# Altium PCB Tube1.PcbDoc
Units mil, origin at the board's own origin, x right, y up, seen from the top; angles counter-clockwise.
Board outline 3880 x 3880 mil, 2 copper layers (Top Layer, Bottom Layer); 66 components, 44 nets, 274 pads, 51 vias.
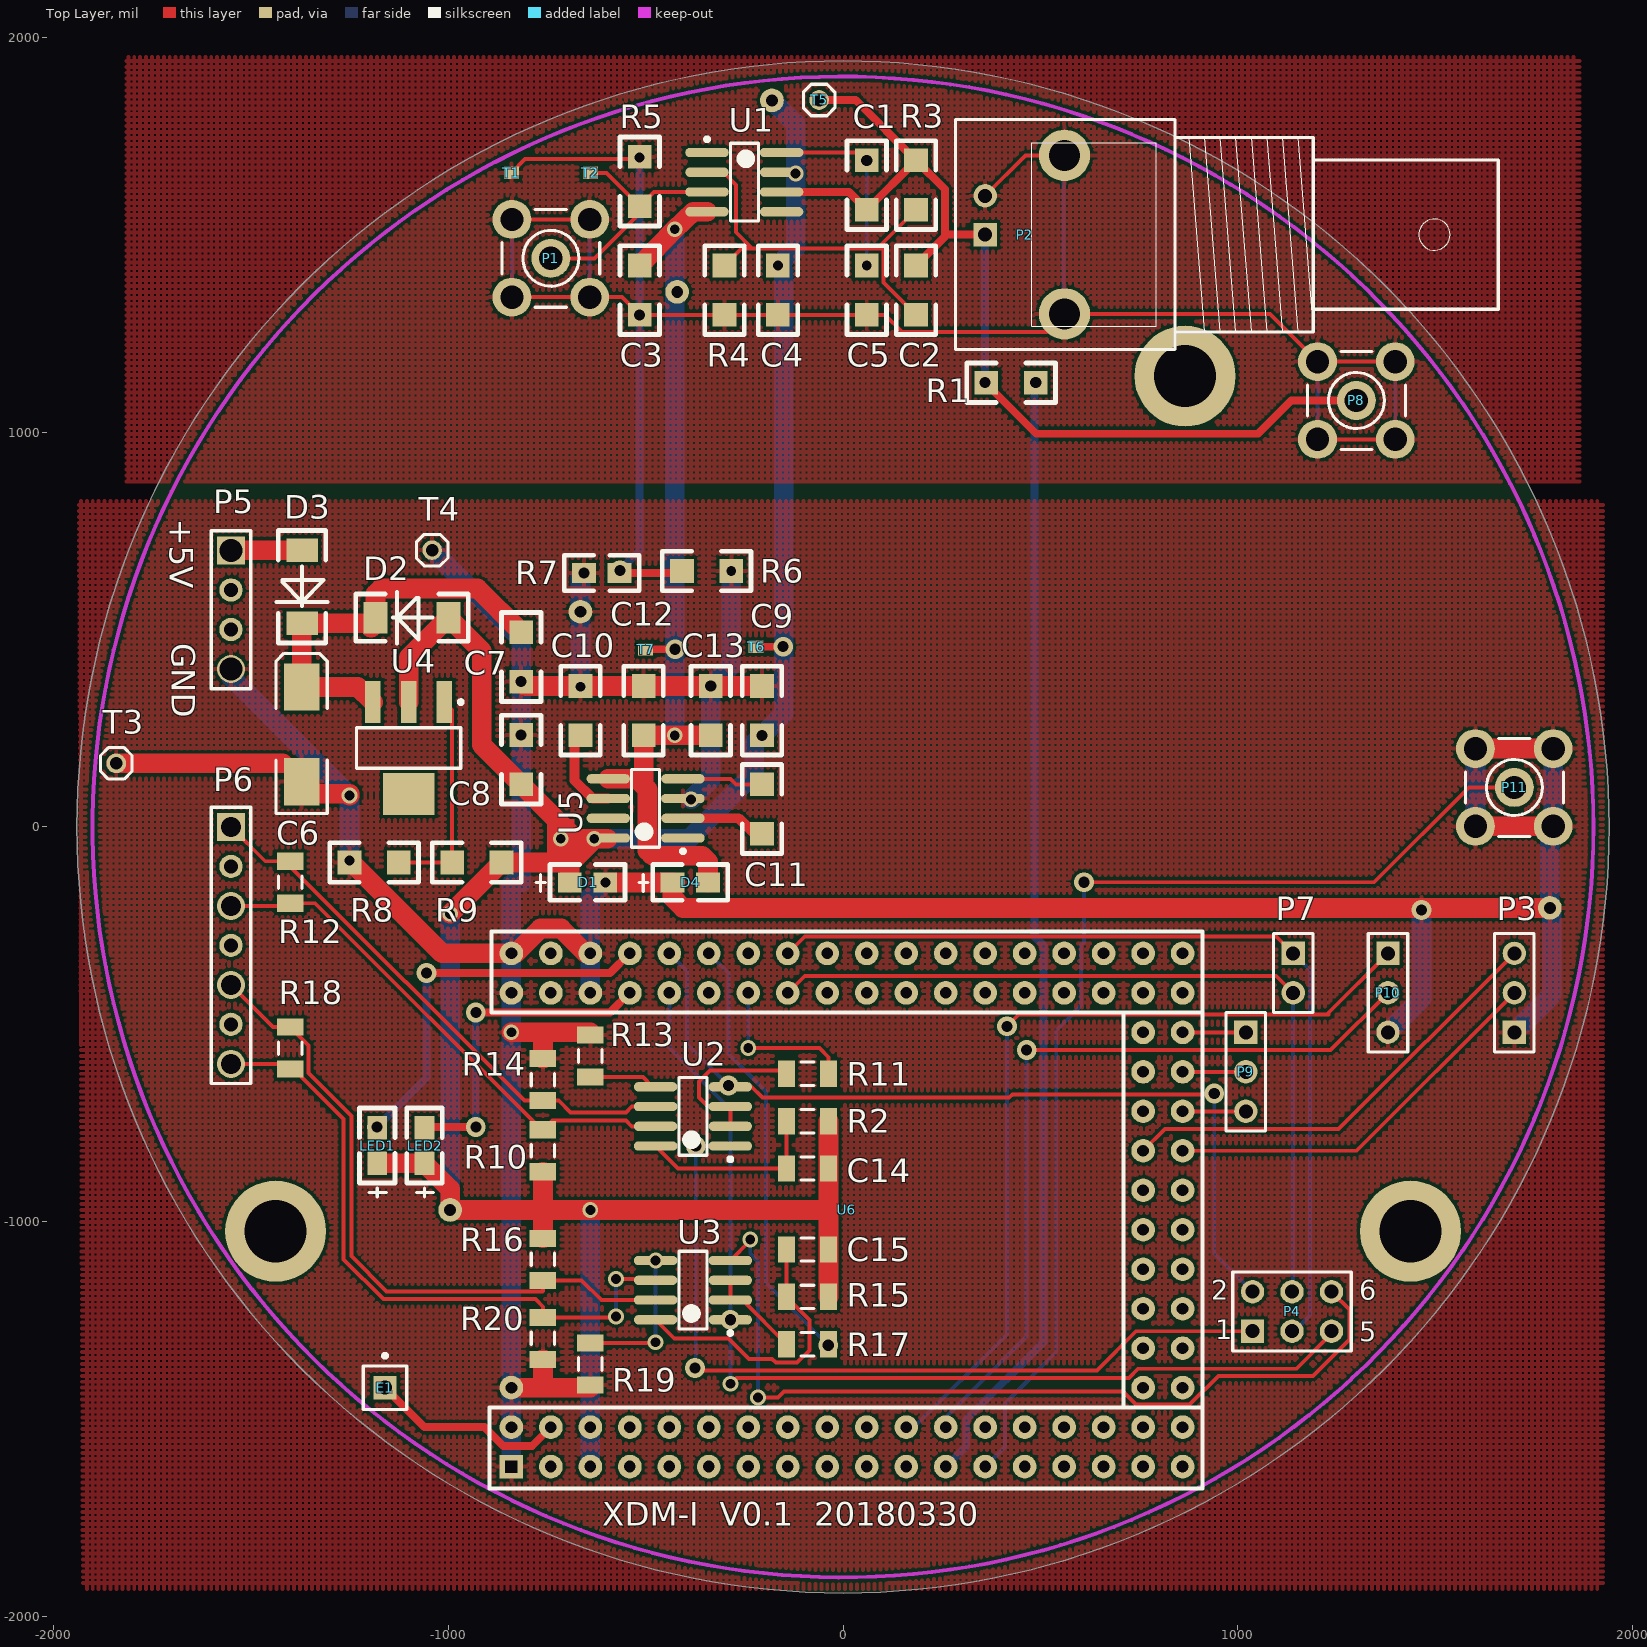
[diagram p0: Top Layer view]
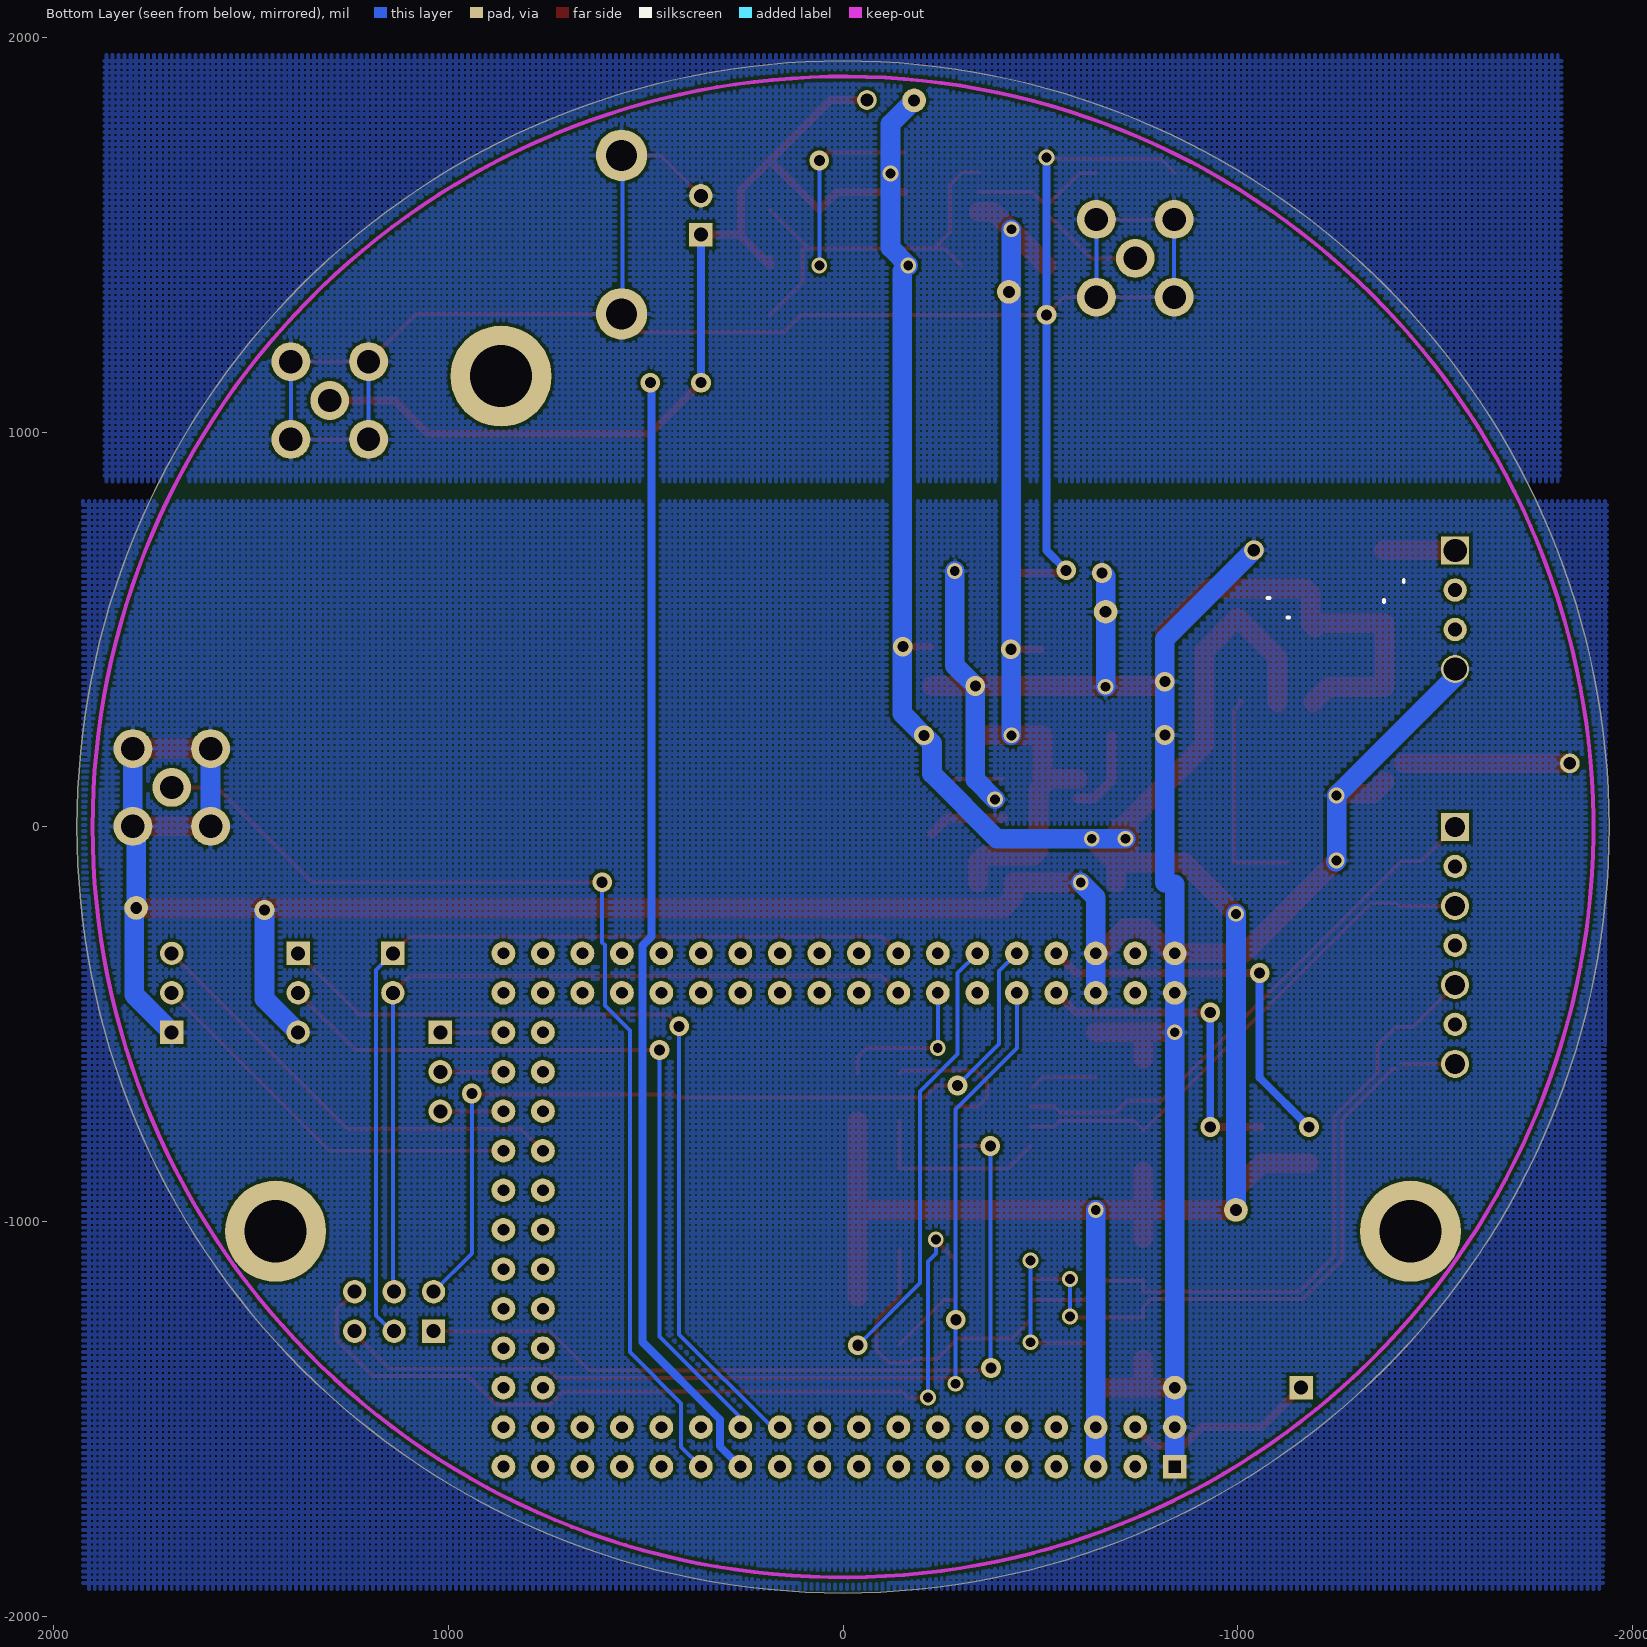
[diagram p1: Bottom Layer view, seen from below]

## Layer stack, top to bottom
Top Layer: signal copper 1.4
Dielectric: dielectric 12.6, FR-4, Dk 4.8
Bottom Layer: signal copper 1.4

## Board outline
0,-1940 cw(c0,0) -1940,0 cw(c0,0) 0,1940 cw(c0,0) 1940,0 cw(c0,0)

## Design rules (kind name [scope] priority, off if disabled: settings)
Clearance [All] p1: gap=8
ComponentClearance [All] p1 off: gap=10 collisioncheckmode=3 verticalgap=10 showdistances=FALSE
DiffPairsRouting [All] p1: maxlimit=10 minlimit=10 mostfreqgap=10 maxuncoupledlength=500
HoleSize [All] p1: absolutevalues=TRUE maxlimit=200 minlimit=1 maxpercent=80.000 minpercent=20.000
PolygonConnect [All] p1: connectstyle=Relief reliefconductorwidth=10 reliefentries=4 polygonreliefangle="90 Angle"
RoutingVias [All] p1: holewidth=25 width=40 viastyle="Through Hole" minholewidth=28 minwidth=50 maxholewidth=28 maxwidth=50
SilkscreenOverComponentPads [All] p1: minsilkscreentomaskgap=10
SolderMaskExpansion [All] p1: expansion=4
Width Width_All [All] p1: maxlimit=50 minlimit=10 preferedwidth=10
Width Width_VCC5- [InNet('VCC5-')] p2: maxlimit=50 minlimit=20 preferedwidth=50
Width Width_VCC5+ [InNet('VCC5+')] p3: maxlimit=50 minlimit=20 preferedwidth=50
Width Width_5+ [InNet('+5V')] p4: maxlimit=50 minlimit=20 preferedwidth=50
24 further rules are at their usual default settings.

## Classes and differential pairs
component class Con485: C14 C15 P3 P4 P6 P7 R2 R10 R11 R12 R13 R14 R15 R16 R17 R18 R19 R20 U2 U3
component class Power: C6 C7 C8 C9 C10 C11 C12 C13 D1 D2 D3 D4 P5 R6 R7 R8 R9 T3 T4 T6 T7 U4 U5
component class AMP: C1 C2 C3 C4 C5 P1 P2 P8 R1 R3 R4 R5 T1 T2 T5 T? U1
component class MCU: E1 LED1 LED2 P9 P10 P11 U6 U7 U8
differential pair CON1: +CON1_P -CON1_N
differential pair CON2: +CON2_P -CON2_N

## Components (designator, comment, footprint, x,y, rotation, side; value= is the part's Value field where it differs from the comment)
C1 "Cap" 1206 65,1620 r90 top
C2 "Cap" 1206 180,1365 r270 top
C3 "Cap" 1206 -520,1365 r270 top
C4 "Cap" 1206 -170,1365 r270 top
C5 "Cap" 1206 55,1365 r270 top
C6 "Cap Pol3" 6032 -1376.43,240 r270 top
C7 "Cap Semi" 1206 -810,425 r90 top
C8 "Cap Semi" 1206 -810,165 r90 top
C9 "Cap Semi" 1206 -200,289 r90 top
C10 "Cap Semi" 1206 -660,289 r90 top
C11 "Cap Pol3" 1206 -200,40 r90 top
C12 "Cap Pol3" 1206 -500,289 r90 top
C13 "Cap Semi" 1206 -340,300 r270 top
C14 "Cap Semi" CAPC3216L -90,-865 r0 top
C15 "Cap Semi" CAPC3216L -90,-1070 r0 top
D1 "LED2" 0805_LED -660,-140 r0 top
D2 "Diode" 1N5824 -1100,520 r180 top
D3 "Diode" 1N5824 -1360,600 r270 top
D4 "LED2" 0805_LED -400,-140 r0 top
E1 "Antenna" PIN1 -1160,-1420 r0 top
LED1 "LED" 0805_LED -1180,-820 r90 top
LED2 "LED" 0805_LED -1060,-820 r90 top
P1 "SMB" SMB_V-RJ45 -740,1440 r0 top
P2 "BNC" "BNC_RA CON" 360,1500 r180 top
P3 "Header 3" HDR1X3 1700,-520 r90 top
P4 "Header 3X2" HDR2X3 1037,-1277 r0 top
P5 "Header 4" HDR1X4 -1550,700 r270 top locked
P6 "Header 7" HDR1X7 -1550,0 r270 top
P7 "Header 2" HDR1X2 1140,-320 r270 top
P8 "SMB" SMB_V-RJ45 1300,1080 r0 top
P9 "Header 3" HDR1X3 1020,-520 r270 top
P10 "Header 3" HDR1X3 1380,-320 r270 top
P11 "SMB" SMB_V-RJ45 1700,100 r0 top
R1 "Res Semi" 1206 420,1120 r0 top
R2 "Res Semi" RESC3216L -90,-745 r0 top
R3 "Res2" 1206 180,1631 r270 top
R4 "Res2" 1206 -305,1365 r270 top
R5 "Res2" 1206 -520,1640 r270 top
R6 "Res Semi" 1206 -340,653.02 r180 top
R7 "Res Semi" 0805R -600,640 r270 top
R8 "Res Semi" 1206 -1193,-95 r0 top
R9 "Res Semi" 1206 -933,-95 r0 top
R10 "Res Semi" RESC3216L -760,-820 r270 top
R11 "Res Semi" RESC3216L -90,-625 r0 top
R12 "Res Semi" RESC3216L -1400,-140 r270 top
R13 "Res Semi" RESC3216L -640,-580 r270 top
R14 "Res Semi" RESC3216L -760,-640 r270 top
R15 "Res Semi" RESC3216L -90,-1190 r0 top
R16 "Res Semi" RESC3216L -760,-1095 r90 top
R17 "Res Semi" RESC3216L -90,-1310 r0 top
R18 "Res Semi" RESC3216L -1400,-560 r90 top
R19 "Res Semi" RESC3216L -640,-1360 r90 top
R20 "Res Semi" RESC3216L -760,-1295 r90 top
T1 "Sensor" TEST_2#1 -840,1660 r0 top
T2 "Sensor" TEST_2#1 -640,1660 r0 top
T3 "TEST" TEST -1840,160 r0 top
T4 "TEST" TEST -1040,700 r0 top
T5 "TEST" TEST -60,1840 r0 top
T6 "TEST" TEST_2#1 -220,460 r0 top
T7 "TEST" TEST_2#2 -500,460 r0 top
U1 "AD797" SO8 -250,1640 r270 top
U2 "MAX485" SO8 -380,-740 r90 top
U3 "MAX485" SO8 -380,-1180 r90 top
U4 "LM317" SOT223 -1100,200 r270 top
U5 "ICL7660" SO8 -500,40 r90 top
U6 "MCU_CON" MCU_CON -840,-1620 r0 top locked

## Footprints (in the part's own frame and the unit in brackets; to place one, negate y for a bottom-side part, rotate by r counter-clockwise, add the part's x,y. Pads: shape width x height; smd on the part's side, far side on the other; paste and mask are expansions set on the pad)
1N5824 [mil]
  rect 60x80 smd: 1(-101,-10) 2(84,-10)
  silkscreen extent -151,-75 134,55
0805_LED [mil]
  rect 60x50 smd: 1(-31.92,-0.36) 2(58.08,-0.36)
  silkscreen extent -117,-45 108,45
0805R [mil]
  rect 50x60 smd: 1(-3.02,-56.08) 2(-3.02,33.92)
  silkscreen extent -48,-106 42,84
1206 [mil]
  rect 60x60 smd: 1(-57,5) 2(68,5)
  silkscreen extent -107,-45 118,55
6032 [mil]
  rect 120x90 smd: 1(-114.58,5.37) 2(125.42,5.37)
  silkscreen extent -200,-60 205,70
"BNC_RA CON" [mm] "Connector; BNC Elbow"
  rect 1.5x1.5 hole 0.9: 1(0,0)
  round 3.3 hole 2: 2(-5.1,5.1) 2(-5.1,-5.1)
  round 1.5 hole 0.9: 2(0,-2.5)
  silkscreen extent -33,-7.4 1.9,7.4
CAPC3216L [mm] "Chip Capacitor, Body 3.2x1.6mm, IPC High Density"
  rect 1.1x1.7 smd: 1(-1.35,0) 2(1.35,0)
  silkscreen extent -0.4,-0.75 0.4,0.75, body extent -1.7,-0.9 1.7,0.9, height 1.3
HDR1X2 [mm] "Connector; Header; 2 Position"
  rect 1.5x1.5 hole 0.9: 1(0,0)
  round 1.5 hole 0.9: 2(2.54,0)
  silkscreen extent -1.27,-1.27 3.81,1.27
HDR1X3 [mm] "Connector; Header; 3 Position"
  rect 1.5x1.5 hole 0.9: 1(0,0)
  round 1.5 hole 0.9: 2(2.54,0) 3(5.08,0)
  silkscreen extent -1.27,-1.27 6.35,1.27
HDR1X4 [mm] "Connector; Header; 4 Position"
  rect 1.8x1.8 hole 1.5: 1(0,0)
  round 1.5 hole 0.9: 2(2.54,0) 3(5.08,0)
  round 1.8 hole 1.5: 4(7.62,0)
  silkscreen extent -1.27,-1.27 8.89,1.27
HDR1X7 [mm] "Connector; Header; 7 Position"
  rect 1.8x1.8 hole 1.3: 1(0,0)
  round 1.5 hole 0.9: 2(2.54,0) 4(7.62,0) 6(12.7,0)
  round 1.8 hole 1.3: 3(5.08,0) 5(10.16,0) 7(15.24,0)
  silkscreen extent -1.27,-1.27 16.51,1.27
HDR2X3 [mm] "Connector; Header; 3x2 Position"
  rect 1.5x1.5 hole 0.9: 1(0,0)
  round 1.5 hole 0.9: 2(0,2.54) 3(2.54,0) 4(2.54,2.54) 5(5.08,0) 6(5.08,2.54)
  silkscreen extent -1.27,-1.27 6.35,3.81
MCU_CON [mil] "Connector for STM32F407VET6 mini Borad"
  rect 60x60 hole 30 square: 1(0,0)
  round 60 hole 30: 2(0,100) 3(100,0) 4(100,100) 5(200,0) 6(200,100) 7(300,0) 8(300,100) 9(400,0) 10(400,100) 11(500,0) 12(500,100) 13(600,0) 14(600,100) 15(700,0) 16(700,100) 17(800,0) 18(800,100) 19(900,0) 20(900,100) 21(1000,0) 22(1000,100) 23(1100,0) 24(1100,100) 25(1200,0) 26(1200,100) 27(1300,0) 28(1300,100) 29(1400,0) 30(1400,100) 31(1500,0) 32(1500,100) 33(1600,0) 34(1600,100) 35(1700,0) 36(1700,100) 37(1700,200) 38(1600,200) 39(1700,300) 40(1600,300) 41(1700,400) 42(1600,400) 43(1700,500) 44(1600,500) 45(1700,600) 46(1600,600) 47(1700,700) 48(1600,700) 49(1700,800) 50(1600,800) 51(1700,900) 52(1600,900) 53(1700,1000) 54(1600,1000) 55(1700,1100) 56(1600,1100) 57(0,1300) 58(0,1200) 59(100,1300) 60(100,1200) 61(200,1300) 62(200,1200) 63(300,1300) 64(300,1200) 65(400,1300) 66(400,1200) 67(500,1300) 68(500,1200) 69(600,1300) 70(600,1200) 71(700,1300) 72(700,1200) 73(800,1300) 74(800,1200) 75(900,1300) 76(900,1200) 77(1000,1300) 78(1000,1200) 79(1100,1300) 80(1100,1200) 81(1200,1300) 82(1200,1200) 83(1300,1300) 84(1300,1200) 85(1400,1300) 86(1400,1200) 87(1500,1300) 88(1500,1200) 89(1600,1300) 90(1600,1200) 91(1700,1300) 92(1700,1200)
  silkscreen extent -55,-55 1750,1355
PIN1 [mm] "Generic Antenna; 1 Lead"
  rect 1.5x1.5 hole 0.9: 1(0,0)
  silkscreen extent -1.4,-1.4 1.4,2.17
RESC3216L [mm] "Chip Resistor, Body 3.1x1.6mm, IPC High Density"
  rect 1.1x1.7 smd: 1(-1.35,0) 2(1.35,0)
  silkscreen extent -0.4,-0.75 0.4,0.75, body extent -1.68,-0.87 1.68,0.87, height 2.54
SMB_V-RJ45 [mm] "Connector; SMB Straight"
  round 2.5 hole 1.5: 1(0,0) 2(-2.5,-2.5) 2(-2.5,2.5) 2(2.5,-2.5) 2(2.5,2.5)
  silkscreen extent -3.15,-3.15 3.15,3.15
SO8 [mm]
  oval 0.6x2.8 smd: 1(-1.727,-2.4) 2(-0.457,-2.4) 3(0.813,-2.4) 4(2.083,-2.4) 5(2.083,2.4) 6(0.813,2.4) 7(-0.457,2.4) 8(-1.727,2.4)
  silkscreen extent -2.7,-2.52 2.68,0.9, body extent -2.32,-2 2.68,2, height 1.7
SOT223 [mm]
  rect 2.7x1 smd: 1(-2.95,2.3) 2(-2.95,0) 3(-2.95,-2.3)
  rect 2.7x3.3 smd: 4(2.95,0)
  silkscreen extent -3.07,-3.35 1.3,3.48, body extent -1.85,-3.35 1.85,3.35, height 1.7
TEST [mil]
  round 50 hole 32: 1(-0.52,1.03)
  silkscreen extent -41,-39 39,41
TEST_2#1 [mm]
  rect 0.96x0.8 smd: 1(0,-0.089)
TEST_2#2 [mm]
  rect 0.96x0.8 smd: 1(0,-0.254)

## Part data
C1 C2 C3 C4 C5: "Capacitor"
C6 C11 C12: "Polarized Capacitor (Surface Mount)"
C7 C8 C9 C10 C13 C14 C15: "Capacitor (Semiconductor SIM Model)"
D1 D4: "Typical RED, GREEN, YELLOW, AMBER GaAs LED"
D2 D3: "Default Diode"
E1: "Generic Antenna"
P1 P8 P11: "SMB Straight Connector"
P2: "BNC Elbow Connector"
P3 P9 P10: "Header, 3-Pin"
P4: "Header, 3-Pin, Dual row"
P5: "Header, 4-Pin"
P6: "Header, 7-Pin"
P7: "Header, 2-Pin"
R1 R2 R6 R7 R8 R9 R10 R11 R12 R13 R14 R15 R16 R17 R18 R19 R20: "Semiconductor Resistor"
R3 R4 R5: "Resistor"
T1 T2: library part TEST

## Free pads (board coordinates)
  round 60 hole 30: 0(-665,545) 0(-420,1355) 1(-840,-1420) 2(-180,1840) 2(1790,-205) 3(-995,-970)
  round 255.91 hole 157.48: 1(-1437.01,-1023.62) 1(866.14,1141.73) 1(1437.01,-1023.62)

## Via types
v1: diameter 50, hole 28, Top Layer to Bottom Layer, 26 vias
v2: diameter 40, hole 25, Top Layer to Bottom Layer, 25 vias

## Nets (pads, with @x,y where several pads share a name; then routed paths per layer and width w, separated by ;. In a path a pad name is that pad's centre, name@x,y a point inside that pad or via, vN(x,y) a via of type N, cw(c..) or ccw(c..) an arc to the next point about the centre after c; other vN are vias at no path point)
+5V: C6.1 C7.2 D2.2 D3.2 U4.3 | length 1403.4
  Top Layer w50: D2.2@-1195.49,504.51 D2.2@-1184,516 ; U4.3 -1228.99,354.58 C6.1 ; C7.2 -926,604 -1170,604 -1184,590 D2.2 D2.2@-1184,516 ; C6.1 D3.2@-1371.06,516 ; C6.1 D3.2@-1371.06,516 ; D3.2@-1371.06,516 D3.2 ; D3.2 D2.2@-1184,516 ; D3.2 D2.2@-1184,516
AD1_IN+: P1.1 R5.2 T2.1 U1.3 | length 617.6
  Top Layer w10: P1.1 -629,1440 R5.2@-515,1554 ; T2.1 -599.5,1656.5 R5.2 -479,1608 U1.3
AD1_IN-: C2.2 R3.2 R4.1 U1.2 | length 1021.9
  Top Layer w10: U1.2 -303,1658 -271,1626 -271,1506 -230,1465 ; R4.1 -257,1465 -230,1465 ; 90,1468 R3.2 ; C2.2 103,1379 103,1465 -230,1465
AD1_OUT: C1.1 C2.1 P2.1 P8.1 R1.1 R3.1 T5.1 U1.6 | length 2624.5
  Top Layer w10: U1.6 U1.6@-108,1608 ; C1.1@52,1571 C1.1
  Top Layer w20: U1.6 15,1608 C1.1 R3.1 ; T5.1 31.97,1841.03 R3.1 ; C2.1@185,1438 C2.1 258,1495 258,1615 R3.1 ; 263,1500 P2.1 ; v1(360,1125) 489.22,995.78 1050.78,995.78 1135,1080 P8.1
  Bottom Layer w20: P2.1 v1(360,1125) v1@363,1125
AGND: C3.2 C4.2 C5.2 P1.2 P2.2 P8.2 R4.2 R5.1 R6.2 R7.2 T1.1 | length 6510.8
  Top Layer w10: P1.2@-840,1343.15 -838.43,1341.57 -641.57,1341.57 -559.57,1341.57 v1(-515,1297) R4.2 ; T1.1 -804.93,1691.56 -518.44,1691.56 v2(-515,1695) R5.1 R5.1@-515,1700 ; P1.2@-838.43,1538.43 P1.2@-641.57,1538.43 ; -270,1297 R4.2 ; C4.2 R4.2 ; -135,1297 C5.2 106.62,1297 149.62,1254 515.57,1254 560.79,1299.21 1080.79,1299.21 1201.57,1178.43 P8.2@1398.43,1178.43 ; P2.2@360,1598.43 462.36,1700.79 P2.2@560.79,1700.79 ; P8.2@1201.57,981.57 P8.2@1398.43,981.57 ; R5.1@-516.5,1698.5 -517.5,1697.5 R5.1@-516.5,1698.5 ; R5.1@-516.5,1698.5 R5.1@-515,1700 ; R5.1@-516.5,1698.5 R5.1@-515,1700
  Top Layer w20: R7.2@-565,643.02 R7.2 -565,640 R7.2@-565,643.02 ; R7.2@-565,643.02 -413,643.02 R7.2@-565,643.02
  Bottom Layer w10: P1.2@-838.43,1341.57 P1.2@-838.43,1538.43 ; P1.2@-641.57,1341.57 P1.2@-641.57,1538.43 ; P2.2@558.57,1297 558.57,1299.21 558.57,1698.57 P2.2@560.79,1700.79 ; P8.2@1201.57,981.57 P8.2@1201.57,1178.43 ; P8.2@1398.43,981.57 P8.2@1398.43,1178.43
  Bottom Layer w20: v1(-565,650) -515,700 ; v2@-518.44,1691.56 v2(-515,1695) ; v2@-516.5,1698.5 v2(-515,1695) ; v1(-515,1297) -515,700 ; v2@-515,1697 v2(-515,1695) ; -515,700 v2(-515,1695)
CON1_N: P6.3 R10.1 R12.2 U2.7 | length 2173.2
  Top Layer w10: P6.3 R12.2@-1406.85,-200 ; R12.2 -1336.85,-193.15 ; R10.1@-761.57,-768.43 R10.1@-760,-766.85 ; U2.7 -535,-758 -550,-743 -736.15,-743 ; -1336.85,-193.15 R10.1@-761.57,-768.43 ; -1336.85,-193.15 R10.1@-761.57,-768.43 ; R10.1@-761.57,-768.43 R10.1@-760,-766.85 ; R10.1@-760,-766.85 -736.15,-743 ; R10.1@-760,-766.85 -736.15,-743
CON1_P: P6.1 R12.1 R14.2 U2.6 | length 3944.2
  Top Layer w10: P6.1 -1463.15,-86.85 R12.1@-1413.15,-86.85 ; U2.6 -535,-708 -550,-723 -690.15,-723 -720,-693.15 R14.2 -806.85,-693.15 ; R12.1@-1413.15,-86.85 -806.85,-693.15 ; R12.1@-1413.15,-86.85 R12.1@-1406.57,-93.43 ; R12.1@-1413.15,-86.85 R12.1@-1406.57,-93.43 ; R12.1@-1406.57,-93.43 -806.85,-693.15 ; R12.1@-1406.57,-93.43 -806.85,-693.15 ; R12.1@-1406.57,-93.43 -806.85,-693.15
CON2_N: P6.5 R16.1 R18.2 U3.7 | length 1693.6
  Top Layer w10: P6.5 -1443.15,-506.85 R18.2 -1353.54,-553.31 -1353.54,-623.18 -1245,-731.72 -1245,-1086.72 -1155.86,-1175.86 -760.86,-1175.86 -760,-1175 R16.1 -661.85,-1148.15 -612,-1198 U3.7
CON2_P: P6.7 R18.1 R20.2 U3.6 | length 1829.6
  Top Layer w10: P6.7 R18.1@-1413.15,-600 ; R18.1 -1391.85,-613.15 -1265,-740 -1265,-1095 -1164.14,-1195.86 -779.14,-1195.86 -760,-1215 R20.2 ; v2(-575,-1240) v2@-575,-1241.85 ; v2(-575,-1145) -477.49,-1145 U3.6 ; R20.2 v2@-575,-1241.85 ; R20.2 v2@-575,-1241.85
  Bottom Layer w10: v2(-575,-1240) v2(-575,-1145)
CTRL1: R11.2 U6.70 | length 394.6
  Top Layer w10: v2(-240,-560) -60,-560 -36.85,-583.15 R11.2
  Bottom Layer w10: v2(-240,-560) U6.70
CTRL2: R17.2 U6.67 | length 1117.8
  Bottom Layer w10: U6.67 -290,-370 -290,-575 -195,-670 -195,-1155 v1(-37.5,-1312.5)
GND: C6.2 C7.1 C8.2 C9.2 C10.2 C12.2 C13.1 D1.2 D4.1 P3.1 P5.4 P10.3 P11.2 pad.0@-665,545 pad.1@-840,-1420 pad.2@1790,-205 R6.1 R7.1 R8.1 R13.1 R14.1 R19.1 R20.1 T3.1 T4.1 U5.3 U6.1 U6.2 U6.57 U6.58 U6.61 U6.62 | length 12477.9
  Top Layer w50: T3.1 -1419.42,161.03 ; C6.2 C6.2@-1340.34,83.86 ; v2@-1249.96,78.86 v2(-1250,80) v2@-1250,83.86 ; v2(-840,-520) -760,-520 ; R14.1 -760,-520 ; U6.61@-650.9,-320 -713.9,-257 -766.1,-257 -829.1,-320 U6.57 -1015,-320 ; v2(-601.92,-140.36) D4.1 -431.92,-178.08 -405,-205 pad.2@1795,-205 ; P11.2@1601.57,1.57 P11.2@1798.43,1.57 ; P11.2@1601.57,198.43 P11.2@1798.43,198.43 ; C6.2@-1340.34,83.86 v2@-1250,83.86 ; C6.2@-1340.34,83.86 v2@-1250,83.86 ; R8.1@-1247.5,-87.5 -1015,-320 ; R8.1@-1247.5,-87.5 v2(-1250,-85) R8.1@-1247.5,-87.5 ; R8.1@-1247.5,-87.5 -1015,-320 ; pad.1@-840,-1420 -760,-1420 ; pad.1@-840,-1420 -760,-1420 ; pad.1@-840,-1420 -760,-1420 ; -760,-1420 -640,-1420 -760,-1420 ; -760,-1420 R20.1 -760,-1420 ; -760,-520 -640,-520 -760,-520 ; C10.2 -804,357 C10.2 ; C10.2 C12.2 ; C10.2 C12.2 ; C12.2 v1(-335,357) ; v1(-335,357) -225,357 v1(-335,357)
  Bottom Layer w50: P5.4 -1550,380 v2(-1250,80) v2(-1250,-85) v2@-1247.5,-87.5 ; T4.1 -815,475.5 -815,-140.36 v1(-815,233) ; U6.1 U6.2 -840,-1420 v2(-840,-520) U6.58 U6.57 -840,-145.36 ; v2@-665,357 v2(-665,355) -665,545 -665,635 -660,640 v1(-656.08,643.02) ; U6.62 U6.61 -640,-178.44 v2(-601.92,-140.36) ; v2(-385,70) -335,120 v1(-335,357) -283,409 v2(-283,648.02) ; P10.3 1465,-435 v1(1465,-210) ; P11.2@1601.57,1.57 P11.2@1601.57,198.43 ; P3.1 1795,-425 pad.2@1795,-205 ; pad.2@1790,-205 1790,-6.85 1798.43,1.57 P11.2@1798.43,198.43
  other v1: -815,368
LED1: LED1.2 U6.63 | length 977.5
  Top Layer w20: v1(-1055,-370) -590,-370 U6.63
  Bottom Layer w20: v1(-1180,-760) -1055,-635 v1(-1055,-370)
LED2: LED2.2 U6.64 | length 828.4
  Top Layer w20: LED2.2@-1057.71,-760 v1(-930,-760) ; v1(-930,-470) -590,-470 U6.64
  Bottom Layer w20: v1(-930,-760) v1(-930,-470)
NetC1_2: C1.2 C5.1 U1.8 | length 489.8
  Top Layer w10: U1.8 40,1708 v1(60,1688)
  Bottom Layer w10: v2(60,1422) v1(60,1688)
NetC10_1: C10.1 U5.6 | length 216.5
  Top Layer w25: C10.1@-680,230 -680,118.13 -633.87,72 U5.6
NetC11_1: C11.1 U5.2 | length 196.7
  Top Layer w25: U5.2 -264,22 C11.1@-225,-17
NetC11_2: C11.2 U5.4 | length 186.3
  Top Layer w10: U5.4 -284.66,122 -270.66,108 C11.2@-225,108
NetC14_1: C14.1 R2.1 U2.8 | length 474.9
  Top Layer w10: U2.8 -417.49,-865 C14.1 R2.1
NetC15_1: C15.1 R15.1 U3.8 | length 726.7
  Top Layer w10: U3.8 -427.49,-1295 -290,-1295 -238,-1347 -179.65,-1347 -170.19,-1356.46 -116.11,-1356.46 -85,-1325.35 -85,-1248.15 R15.1 C15.1
NetD3_1: D3.1 P5.1 | length 361
  Top Layer w50: P5.1 P5.1@-1550,701 ; P5.1@-1550,701 D3.1 P5.1@-1550,701
NetP4_1: P4.1 U2.1 | length 2129.5
  Top Layer w10: v1(-373,-808) U2.1 ; v1@-362.12,-1361.88 -367,-1357 -375,-1365 v1(-375,-1370) -368.46,-1376.54 642.65,-1376.54 742.19,-1277 P4.1
  Bottom Layer w10: v1(-375,-1370) -375,-1365 -373,-1363 v1(-373,-808)
NetP4_6: P4.6 U3.4 | length 2218.4
  Top Layer w10: U3.4 -235,-1047.49 v2(-235,-1045) ; v2@-215,-1430 v2(-215,-1445) -165,-1445 -150,-1430 709.19,-1430 742.19,-1463 877.81,-1463 950.81,-1390 1190.14,-1390 1282.53,-1297.62 1282.53,-1222.53 P4.6@1240,-1180
  Bottom Layer w10: v2(-235,-1045) -235,-1080 -215,-1100 v2(-215,-1445)
NetP9_1: P9.1 U6.55 | length 160
  Top Layer w10: U6.55 P9.1
NetP9_2: P9.2 U6.53 | length 160
  Top Layer w10: U6.53 P9.2
NetP9_3: P9.3 U6.51 | length 160
  Top Layer w10: U6.51 P9.3
NetR8_2: R8.2 R9.1 U4.1 | length 554.7
  Top Layer w10: R8.2 R9.1 -990,296.69 U4.1 U4.1@-1005.59,320
NetR11_1: R11.1 U2.2 U2.3 | length 415.8
  Top Layer w10: U2.2 U2.3 -342,-708 -365,-685 -365,-645 -337,-617 -151.15,-617 R11.1
NetR13_2: R13.2 U2.5 | length 168.3
  Top Layer w10: R13.2 -506.85,-633.15 U2.5@-482,-658
NetR17_1: R17.1 U3.2 U3.3 | length 238.8
  Top Layer w10: U3.3 U3.2 -255.15,-1198 R17.1
NetR19_2: R19.2 U3.5 | length 369.6
  Top Layer w10: R19.2 v2@-476.85,-1306.85
  Bottom Layer w10: v2(-475,-1305) v2@-475,-1098.51
  other v2: -474.49,-1098
PA1: R1.2 U6.23 | length 2860.3
  Bottom Layer w20: U6.23 312,-1568 312,-1500.12 508,-1304.12 508,-300.12 485,-277.12 485,1125 v1(488,1125)
PA2: P10.1 U6.22 | length 2179
  Top Layer w10: v1(415,-505) 445,-475 1225,-475 ; 1230,-475 1225,-475 ; P10.1 1225,-475
  Bottom Layer w10: U6.22 180,-1520 415,-1285 v1(415,-505)
PA3: P10.2 U6.24 | length 2015
  Top Layer w10: v1(465,-565) 1235,-565 P10.2
  Bottom Layer w10: U6.24 260,-1495 465,-1290 v1(465,-565)
PA4: P11.1 U6.25 | length 2787.1
  Top Layer w10: v1@595,-140 1345,-140 1585,100 P11.1
  Bottom Layer w10: U6.25 410,-1570 410,-1460 540,-1330 540,-515 603,-452 603,-299.19 610,-292.19 610,-155 v1@600,-145
  other v1: 610,-140
U1RX: P4.5 U3.1 U6.66 | length 2635.1
  Top Layer w10: v2(-285,-1410) -270,-1395 724.19,-1395 747.19,-1372 1148,-1372 P4.5@1240,-1280
  Bottom Layer w10: U6.66 -440,-560 -285,-715 v1@-285,-1250 ; v1(-285.51,-1248) v1@-285,-1250 ; v2(-285,-1410) v1@-285,-1250
U1TX: P4.2 U2.4 U6.65 | length 2183
  Top Layer w10: v1(-290,-655) -235,-655 -204.5,-685.5 420.5,-685.5 429,-677 v1@937,-677 ; U2.4@-286,-658 U2.4
  Bottom Layer w10: U6.65 -395,-365 -395,-550 v1(-290,-655) ; v1(940,-675) 940,-1080 P4.2
U2RX: P4.4 P7.2 U6.72 | length 2075.6
  Top Layer w10: U6.72 -97,-377 1097,-377 P7.2
  Bottom Layer w10: P4.4@1140,-1180 P7.2
U2TX: P4.3 P7.1 U6.71 | length 2310.9
  Top Layer w10: U6.71 -97,-277 1097,-277 P7.1
  Bottom Layer w10: P4.3@1140,-1280 1182.53,-1237.47 1182.53,-362.53 P7.1
U3RX: P3.2 U6.49 | length 1005.7
  Top Layer w10: U6.49 1300,-820 P3.2
U3TX: P3.3 U6.50 | length 1147.1
  Top Layer w10: U6.50 815,-765 1255,-765 P3.3
V3.3: E1.1 U6.4 | length 501.2
  Top Layer w20: E1.1 -1060,-1520 -907.88,-1520 -859.88,-1568 -788,-1568 U6.4
VCC5+: C4.1 C8.1 C9.1 C14.2 C15.2 D1.1 D2.1 LED1.1 LED2.1 pad.2@-180,1840 pad.3 R2.2 R9.2 R10.2 R15.2 R16.2 T6.1 U1.7 U4.2 U5.8 U6.5 U6.6 | length 7150.8
  Top Layer w20: T6.1 v1(-151.5,456.5)
  Top Layer w50: LED1.1 LED2.1 -995,-916.56 pad.3 -760,-970 ; U4.2 -1100,429 D2.1 -915,446 -915,208 C8.1 -677,-30 v2(-630,-30) ; v2(-995,-220) R9.2 -693.85,-90 ; R16.2 -760,-970 ; R10.2 -760,-970 ; D1.1 -691.92,-91.92 v2(-630,-30) ; U5.8@-596.49,-30 v2(-630,-30) ; R15.2 C15.2 -36.85,-970 ; R2.2 C14.2 -36.85,-970 ; -760,-970 v2(-640,-970) -36.85,-970
  Bottom Layer w50: pad.3 v2(-995,-220) ; v2(-715,-30) v2(-630,-30) -390,-30 -225,135 -225,212 v1(-205,232) -150,287 v1@-150,455 ; U6.5 U6.6 v2(-640,-970) ; pad.2@-180,1840 -120,1780 v2(-120,1655) -120,1467 v2(-165,1422) ; v1(-151.5,456.5) v1@-150,455 ; -150,1407 v1@-150,455
VCC5-: C3.1 C12.1 C13.2 D4.2 pad.0@-420,1355 T7.1 U1.4 U5.5 | length 3596.4
  Top Layer w20: T7.1 v1(-425,450)
  Top Layer w50: U5.5 -522,122 ; C3.1 v2(-426.3,1513.67) -379,1558 U1.4 ; D4.2 -341.92,-88.08 -357.19,-72.81 -482.19,-72.81 -495,-60 -495,95 ; -522,122 -505,105 ; -522,122 -505,105 ; -505,105 -495,95 ; -505,105 C12.1 ; -505,105 -495,95 ; C12.1 v2(-426.3,232) ; C12.1 v2(-426.3,232) ; v2(-426.3,232) -355,232 v2(-426.3,232)
  Bottom Layer w50: v2(-426.3,232) v1@-426.3,450 ; v1(-425,450) v1@-426.3,450 ; v1@-426.3,450 v2(-426.3,1513.67) v1@-426.3,450
pads on no net: P5.2 P5.3 P6.2 P6.4 P6.6 U1.1 U1.5 U4.4 U5.1 U5.7 U6.3 U6.7 U6.8 U6.9 U6.10 U6.11 U6.12 U6.13 U6.14 U6.15 U6.16 U6.17 U6.18 U6.19 U6.20 U6.21 U6.26 U6.27 U6.28 U6.29 U6.30 U6.31 U6.32 U6.33 U6.34 U6.35 U6.36 U6.37 U6.38 U6.39 U6.40 U6.41 U6.42 U6.43 U6.44 U6.45 U6.46 U6.47 U6.48 U6.52 U6.54 U6.56 U6.59 U6.60 U6.68 U6.69 U6.73 U6.74 U6.75 U6.76 U6.77 U6.78 U6.79 U6.80 U6.81 U6.82 U6.83 U6.84 U6.85 U6.86 U6.87 U6.88 U6.89 U6.90 U6.91 U6.92

## Polygon pours and split planes (outlines as drawn)
GND on Top Layer "Top Layer-No Net" (hatched 90Degree grid 15 track 10): -1935,825 1925,825 1925,-1930 -1925,-1930
AGND on Top Layer "Top Layer-No Net" (hatched 90Degree grid 15 track 10, pour order 1000): -1815,1950 1864.81,1950 1864.81,869.91 1875,860 1859.71,874.86 -1815,874.86
AGND on Bottom Layer "Top Layer-No Net" (hatched 90Degree grid 15 track 10, pour order 1002): -1820,1955 1865,1955 1870,1950 1870,875 -1815,875
GND on Bottom Layer "Top Layer-No Net" (hatched 90Degree grid 15 track 10, pour order 1003): -1935,825 1930,825 1925,820 1925,-1930 -1925,-1930

## Keep-outs
Keep-Out Layer:
  circle w10: c0,0 r1900.42

## Other copper
Top Layer:
  rectangle net VCC5+: -750,-70 -680,20

## Silkscreen, mask and mechanical layers (free items; w line width, h text height)
Top Overlay:
  text "+5V" at -1705,780 h60 r270
  text "GND" at -1700,465 h60 r270
  text "XDM-I  V0.1  20180330" at -610,-1770 h60
Mechanical 1:
  circle w10: c0,0 r1940
Drill Drawing:
  text ".LEGEND" at 2010,-1670 h60
  text "Drill Drawing." at 2010,-1770 h60

## Text inside footprints (layer, text, board x,y; h text height)
P4: Top Overlay "1" at 942,-1297 h50; Top Overlay "2" at 932,-1197 h50; Top Overlay "5" at 1307,-1302 h50; Top Overlay "6" at 1307,-1197 h50